# Altium PCB dental-unit-button v1_0.PcbDoc
Units mm, origin at the board's own origin, x right, y up, seen from the top; angles counter-clockwise.
Board outline 41 x 57.5 mm, 2 copper layers (Top Layer, Bottom Layer), stack 0.571 mm thick; 52 components, 57 nets, 286 pads, 157 vias.
Unrouted connection lines stored in the file: 1.
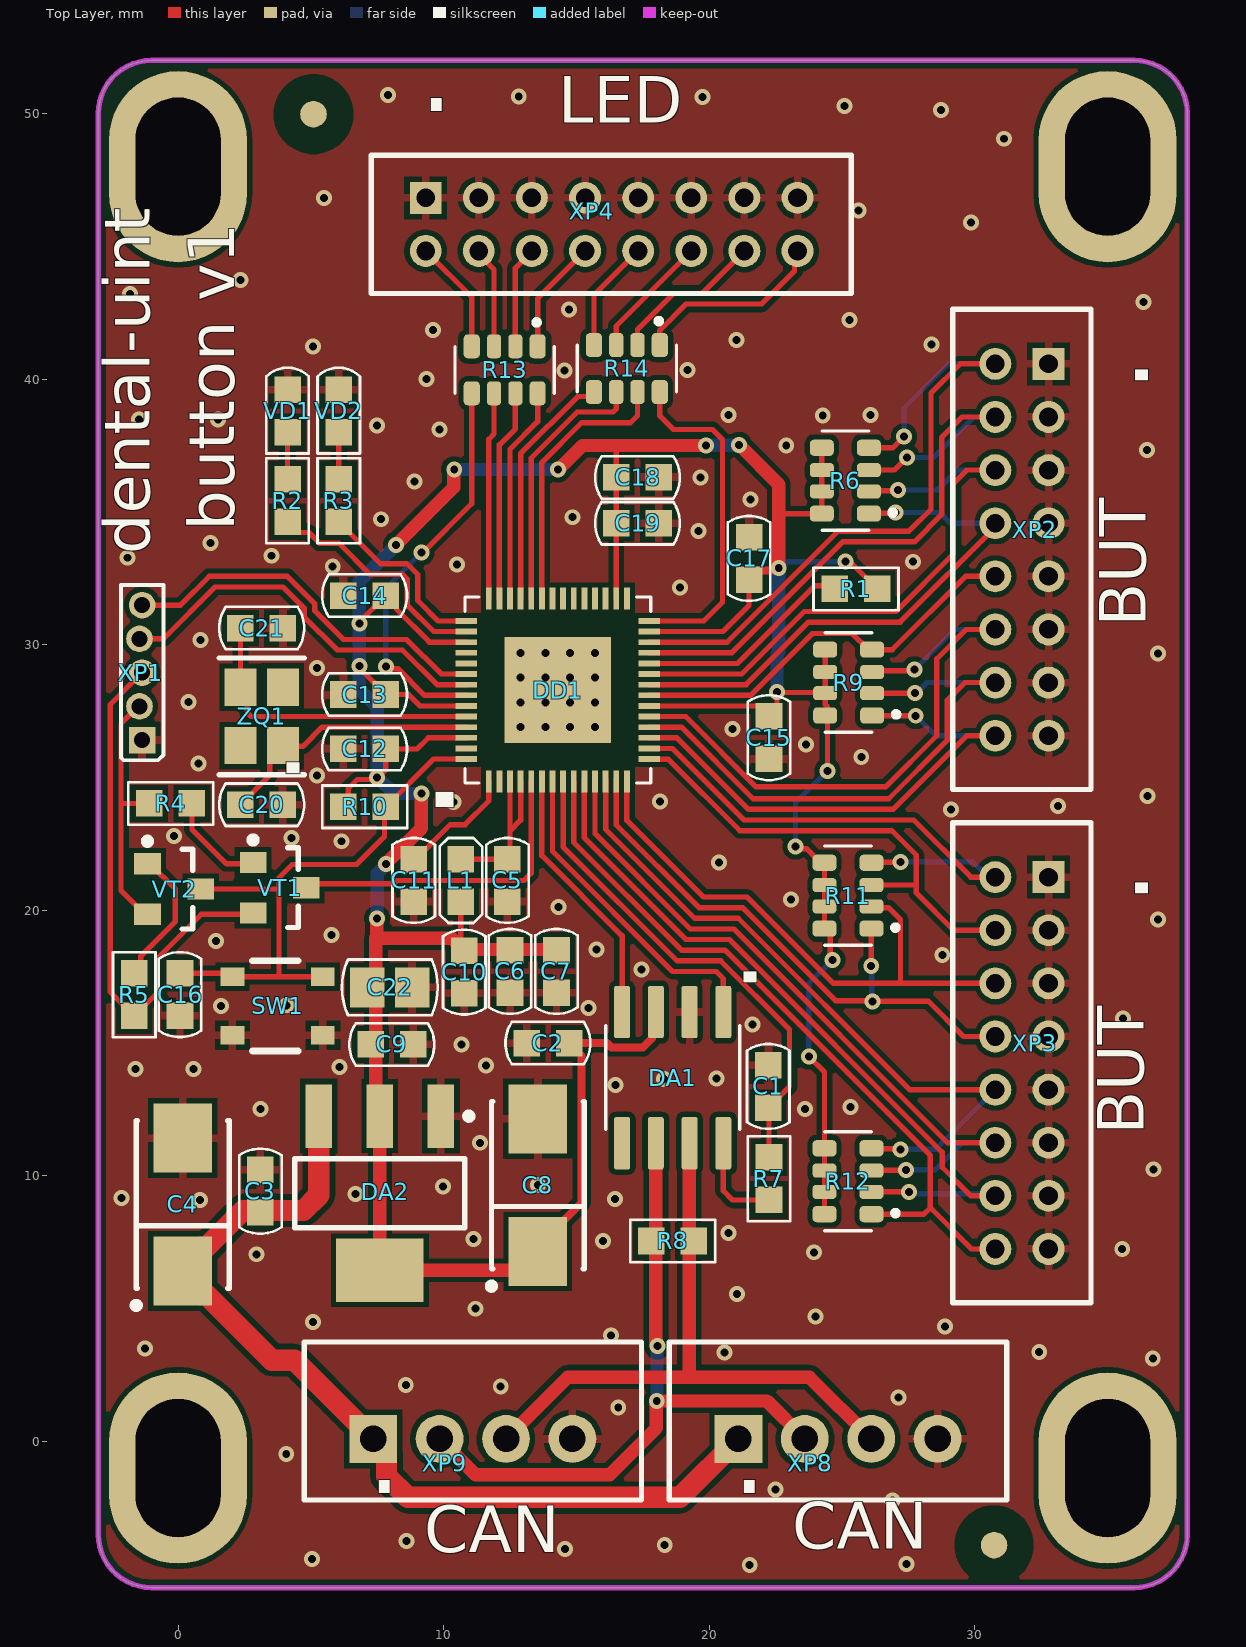
[diagram p0: Top Layer view]
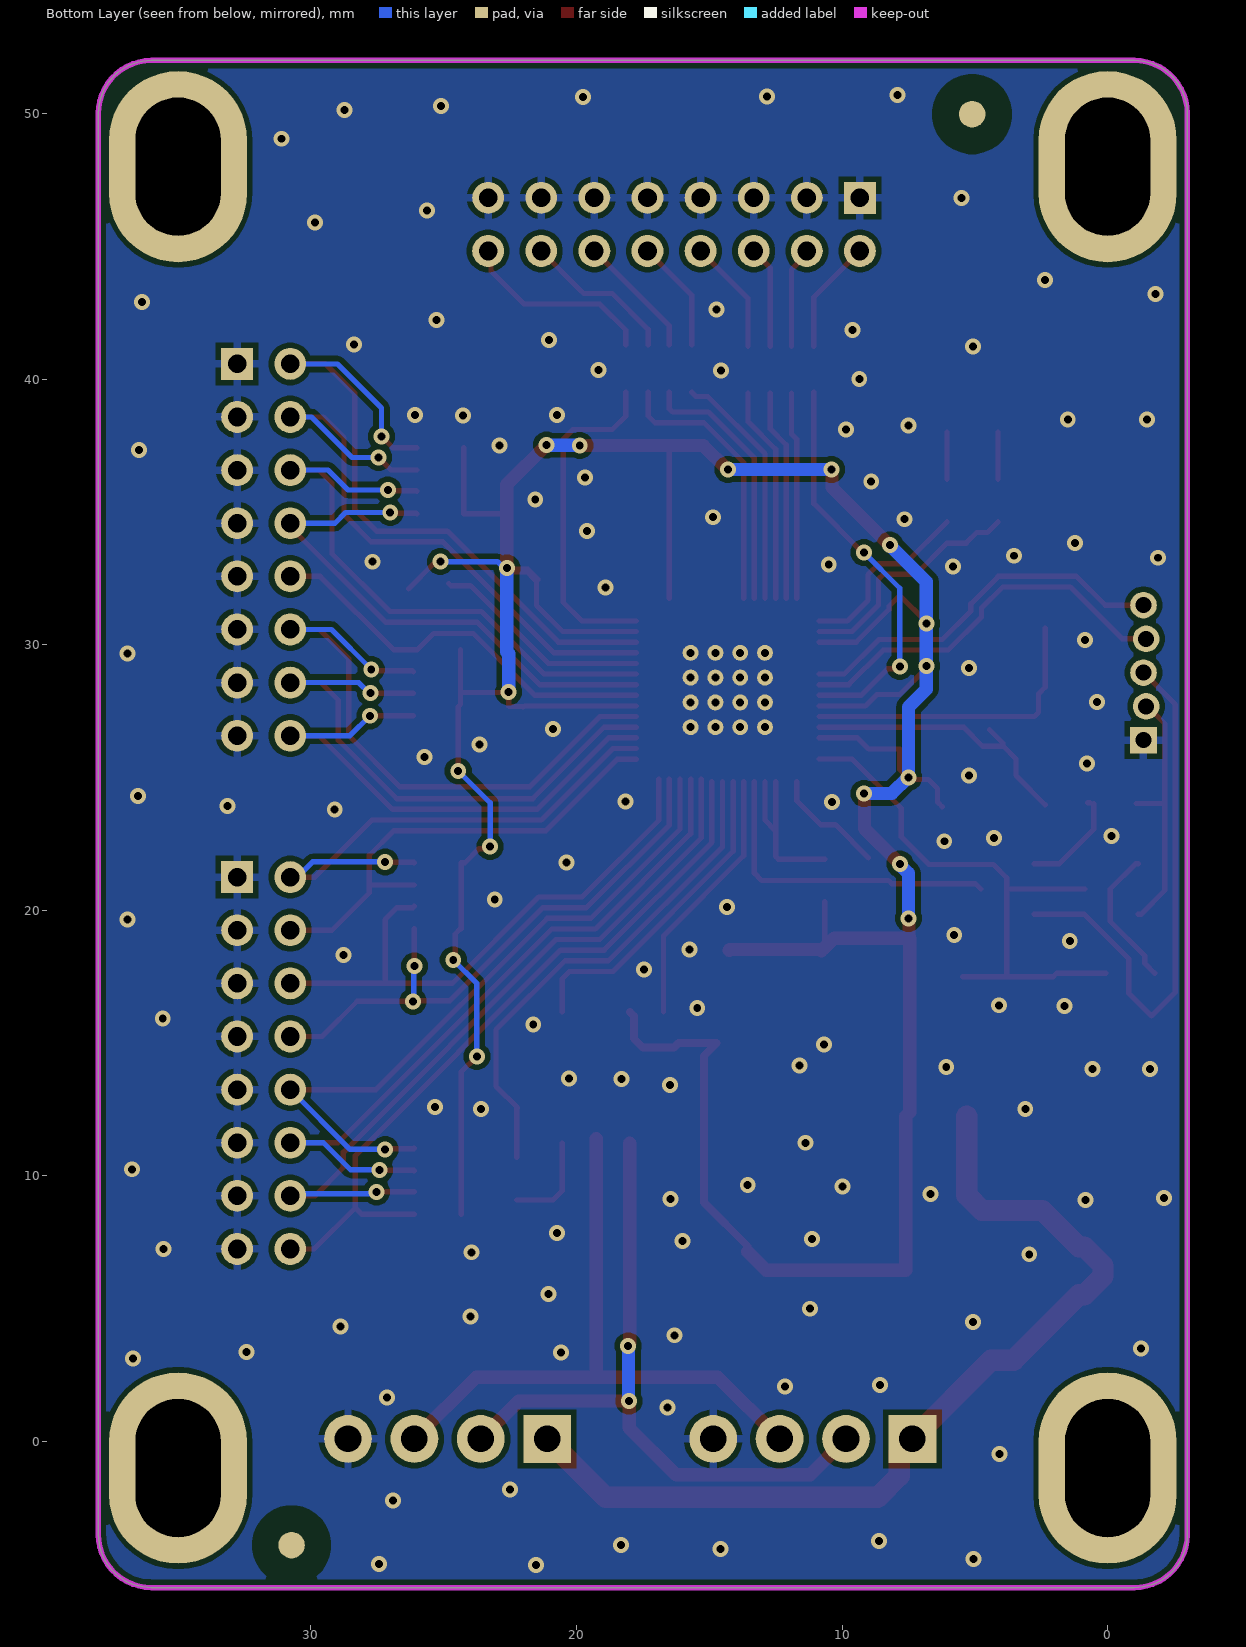
[diagram p1: Bottom Layer view, seen from below]
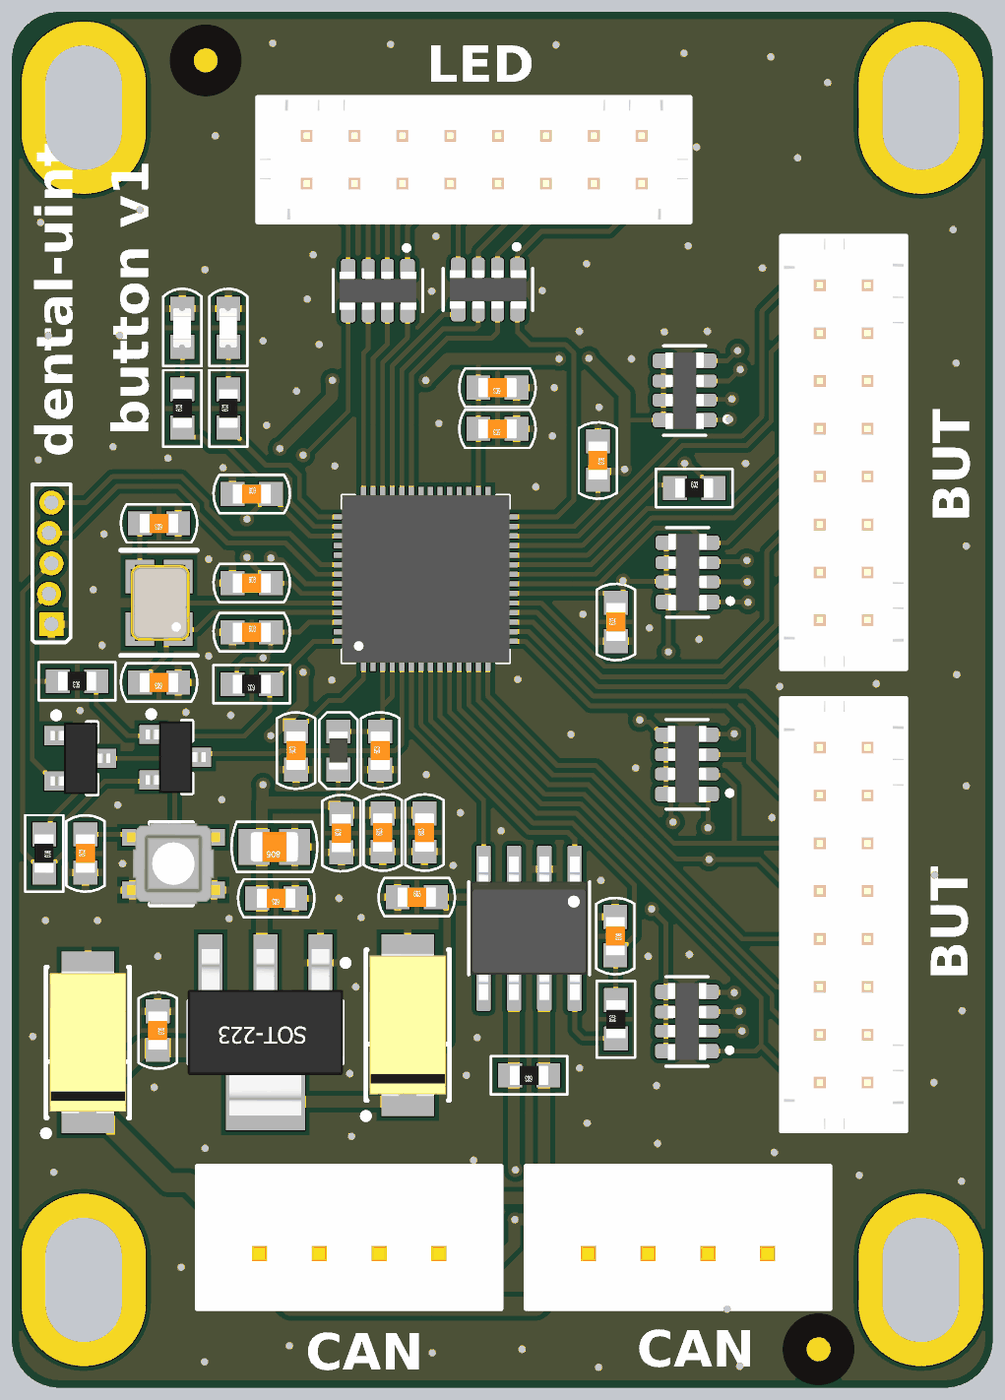
[diagram p2: 3D render of the assembled board from above, using the file's embedded part models]

## Layer stack, top to bottom
Top Solder: solder mask 0.0102, Solder Resist, Dk 3.5
Top Layer: signal copper 0.0356
Dielectric1: core 0.5, FR-4, Dk 4.8
Bottom Layer: signal copper 0.0356
Bottom Solder: solder mask 0.0102, Solder Resist, Dk 3.5

## Board outline
-3,-3.5 ccw(c-1,-3.5) -1,-5.5 36,-5.5 ccw(c36,-3.5) 38,-3.5 38,50 ccw(c36,50) 36,52 -1,52 ccw(c-1,50) -3,50

## Design rules (kind name [scope] priority, off if disabled: settings)
Clearance esp32 [InPadClass('ESP32-S2')] p1: gap=0.2 ignorepadtopadclearanceinfootprint=FALSE except(0: Arc-Hole Track-Hole SMDPad-Hole THPad-Hole Via-Hole Fill-Hole Poly-Hole Region-Hole Text-Hole; 0.15: Arc-SMDPad Track-SMDPad SMDPad-SMDPad)
Clearance "Stitching No Net" [IsStitchingVia and InNet('No Net') vs (IsVia and (Not IsStitchingVia)) Or IsPad] p2: gap=0.127 ignorepadtopadclearanceinfootprint=FALSE except(0: Arc-Hole Track-Hole SMDPad-Hole THPad-Hole Via-Hole Fill-Hole Poly-Hole Region-Hole Text-Hole)
Clearance Clearance_2 [(InPadClass('New Class 2')) vs (InPadClass('New Class 3'))] p3: gap=0.15 ignorepadtopadclearanceinfootprint=FALSE except(0: Arc-Hole Track-Hole SMDPad-Hole THPad-Hole Via-Hole Fill-Hole Poly-Hole Region-Hole Text-Hole)
Clearance Clearance_1 [InPadClass('Reper')] p4: gap=1 ignorepadtopadclearanceinfootprint=FALSE except(0: Arc-Hole Track-Hole SMDPad-Hole THPad-Hole Via-Hole Fill-Hole Poly-Hole Region-Hole Text-Hole)
Clearance [All] p5: gap=0.2 ignorepadtopadclearanceinfootprint=FALSE except(0: Arc-Hole Track-Hole SMDPad-Hole THPad-Hole Via-Hole Fill-Hole Poly-Hole Region-Hole Text-Hole)
HoleSize [All] p1: absolutevalues=TRUE maxlimit=7 minlimit=0.025 maxpercent=80.000 minpercent=20.000
HoleToHoleClearance [All] p1: gap=0.1 allowstackedmicrovias=TRUE
Length [InNetClass('SD_net_class')] p1: maxlimit=27 minlimit=26
MatchedLengths [InNetClass('SD_net_class')] p1: tolerance=1 checknetsindiffpair=FALSE checkdiffpairvsdiffpair=TRUE checkxsignals=TRUE checkothers=TRUE
MinimumSolderMaskSliver [All] p1 off: minsoldermaskwidth=0.1
PlaneClearance [All] p1: clearance=0.2
PlaneConnect [All] p1: planeconnectstyle=Direct reliefexpansion=0.2 reliefentries=4 reliefconductorwidth=0.2 reliefairgap=0.2
PolygonConnect Polygon_24v [InNamedPolygon('24V_L01_P000')] p1: connectstyle=Direct reliefconductorwidth=0.2 reliefentries=4 polygonreliefangle="90 Angle" airgapwidth=0.3
PolygonConnect PolygonConnectCoponent [(InPadClass('New Class'))] p2: connectstyle=Relief reliefconductorwidth=0.3 reliefentries=4 polygonreliefangle="90 Angle" airgapwidth=0.2
PolygonConnect PolygonConnectALL [All] p3: connectstyle=Direct reliefconductorwidth=0.3 reliefentries=2 polygonreliefangle="45 Angle" airgapwidth=0.7
RoutingVias [All] p1: holewidth=0.3 width=0.6 viastyle="Through Hole" minholewidth=0.3 minwidth=0.6 maxholewidth=0.3 maxwidth=0.6
SilkToSilkClearance [All] p1 off: silktosilkclearance=0.254
SilkToSolderMaskClearance [IsPad] p1 off: minsilkscreentomaskgap=0.254 clearancetoexposedcopper=TRUE
SolderMaskExpansion [All] p1: expansion=0.05 istentingtop=FALSE
ViasUnderSMD [All] p1: allowed=FALSE
Width [All] p1: maxlimit=1.5 minlimit=0.2 preferedwidth=0.2
23 further rules are at their usual default settings.

## Classes and differential pairs
pad class ESP32-S2: DD1-1 DD1-2 DD1-3 DD1-4 DD1-5 DD1-6 DD1-7 DD1-8 DD1-9 DD1-10 DD1-11 DD1-12 DD1-13 DD1-14 DD1-15 DD1-16 DD1-17 DD1-18 DD1-19 DD1-20 DD1-21 DD1-22 DD1-23 DD1-24 DD1-25 DD1-26 DD1-27 DD1-28 DD1-29 DD1-30 DD1-31 DD1-32 DD1-33 DD1-34 DD1-35 DD1-36 DD1-37 DD1-38 DD1-39 DD1-40 DD1-41 DD1-42 DD1-43 DD1-44 DD1-45 DD1-46 DD1-47 DD1-48 DD1-49 DD1-50 DD1-51 DD1-52 DD1-53 DD1-54 DD1-55 DD1-56 DD1-57
pad class "Mounting Holes": Free-M0
pad class "New Class": C1-1 C1-2 C2-1 C2-2 C3-1 C3-2 C4-1 C4-2 C5-1 C5-2 C6-1 C6-2 C7-1 C7-2 C8-1 C8-2 C9-1 C9-2 C10-1 C10-2 C11-1 C11-2 C12-1 C12-2 C13-1 C13-2 C14-1 C14-2 C15-1 C15-2 C16-1 C16-2 C17-1 C17-2 C18-1 C18-2 C19-1 C19-2 C20-1 C20-2 C21-1 C21-2 C22-1 C22-2 DA1-1 DA1-2 DA1-3 DA1-4 DA1-5 DA1-6 DA1-7 DA1-8 DA2- DA2-1 DA2-2 DA2-3 DA2-4 DD1-1 DD1-2 DD1-3 DD1-4 DD1-5 DD1-6 DD1-7 DD1-8 DD1-9 DD1-10 DD1-11 DD1-12 DD1-13 DD1-14 DD1-15 DD1-16 DD1-17 DD1-18 DD1-19 DD1-20 DD1-21 DD1-22 DD1-23 DD1-24 DD1-25 DD1-26 DD1-27 DD1-28 DD1-29 DD1-30 DD1-31 DD1-32 DD1-33 DD1-34 DD1-35 DD1-36 DD1-37 DD1-38 DD1-39 DD1-40 DD1-41 DD1-42 DD1-43 DD1-44 DD1-45 DD1-46 DD1-47 DD1-48 DD1-49 DD1-50 DD1-51 DD1-52 DD1-53 DD1-54 DD1-55 DD1-56 Free-M0 L1-1 L1-2 R1-1 R1-2 R2-1 R2-2 R3-1 R3-2 R4-1 R4-2 R5-1 R5-2 R6-1 R6-2 R6-3 R6-4 R6-5 R6-6 R6-7 R6-8 R7-1 R7-2 R8-1 R8-2 R9-1 R9-2 R9-3 R9-4 R9-5 R9-6 R9-7 R9-8 R10-1 R10-2 R11-1 R11-2 R11-3 R11-4 R11-5 R11-6 R11-7 R11-8 R12-1 R12-2 R12-3 R12-4 R12-5 R12-6 R12-7 R12-8 R13-1 R13-2 R13-3 R13-4 R13-5 R13-6 R13-7 R13-8 R14-1 R14-2 R14-3 R14-4 R14-5 R14-6 R14-7 R14-8 SW1-1 SW1-2 VD1-1 VD1-2 VD2-1 VD2-2 VT1-1 VT1-2 VT1-3 VT2-1 VT2-2 VT2-3 XP1-1 XP1-2 XP1-3 XP1-4 XP1-5 XP2- XP2-1 XP2-2 XP2-3 XP2-4 XP2-5 XP2-6 XP2-7 XP2-8 XP2-9 XP2-10 XP2-11 XP2-12 XP2-13 XP2-14 XP2-15 XP2-16 XP3- XP3-1 XP3-2 XP3-3 XP3-4 XP3-5 XP3-6 XP3-7 XP3-8 XP3-9 XP3-10 XP3-11 XP3-12 XP3-13 XP3-14 XP3-15 XP3-16 XP4- XP4-1 XP4-2 XP4-3 XP4-4 XP4-5 XP4-6 XP4-7 XP4-8 XP4-9 XP4-10 XP4-11 XP4-12 XP4-13 XP4-14 XP4-15 XP4-16 XP8- XP8-1 XP8-2 XP8-3 XP8-4 XP9- XP9-1 XP9-2 XP9-3 XP9-4 ZQ1-1 ZQ1-2 ZQ1-3 ZQ1-4
pad class Reper: Free-RepPoint2

## Components (designator, comment, footprint, x,y, rotation, side; value= is the part's Value field where it differs from the comment)
C1 "CC0603KRX7R5BB104" CC_0603 22.225,13.37 r270 top value=0.1uF
C2 "CC0603KRX7R5BB104" CC_0603 13.925,15 r0 top value=0.1uF
C3 "CC0603KRX7R5BB104" CC_0603 3.1,9.425 r270 top value=0.1uF
C4 "TS20001C470KCT000R" CC_TANT_C 0.175,8.925 r90 top value=47uF
C5 "CC0603KRX7R5BB104" CC_0603 12.4,21.125 r90 top value=0.1uF
C6 "CC0603KRX7R5BB104" CC_0603 12.5,17.7 r90 top value=0.1uF
C7 "CL10A105KB8NNNC" CC_0603 14.25,17.7 r90 top value=1uF
C8 "TS20001C470KCT000R" CC_TANT_C 13.55,9.65 r90 top value=47uF
C9 "CC0603KRX7R5BB104" CC_0603 8.05,14.95 r180 top value=0.1uF
C10 "CL10A106KP8NNNC" CC_0603 10.775,17.675 r90 top value=10uF
C11 "CC0603KRX7R5BB104" CC_0603 8.875,21.125 r90 top value=0.1uF
C12 "CC0603FRNPO9BN101" CC_0603 7.025,26.075 r0 top value=100pF
C13 "CL10A105KB8NNNC" CC_0603 7.025,28.125 r0 top value=1uF
C14 "CC0603KRX7R5BB104" CC_0603 7.025,31.85 r0 top value=0.1uF
C15 "CC0603KRX7R5BB104" CC_0603 22.25,26.5 r90 top value=0.1uF
C16 "CC0603KRX7R5BB104" CC_0603 0.075,16.825 r90 top value=0.1uF
C17 "CC0603KRX7R5BB104" CC_0603 21.5,33.25 r270 top value=0.1uF
C18 "CC0603KRX7R5BB104" CC_0603 17.3,36.3 r180 top value=0.1uF
C19 "CL10A105KB8NNNC" CC_0603 17.3,34.575 r180 top value=1uF
C20 "CC0603GPNPO9BN150" CC_0603 3.15,23.975 r180 top value=15pF
C21 "CC0603GPNPO9BN150" CC_0603 3.15,30.625 r180 top value=15pF
C22 "GRM21BR60J226ME39L" CC_0805 7.975,17.1 r180 top value=22uF
DA1 "SN65HVD230D" SOIC-8 18.625,13.7 r270 top
DA2 "LM1117IMPX-3.3" SOT-223 7.6,9.35 r270 top
DD1 "ESP32-S2FH4" QFN40P700X700X90-57T400N 14.3,28.295 r90 top value=ESP32-S2
L1 "LQG18HN1N8S00D" IC_0603 10.65,21.125 r270 top
R1 "AC0603FR-0710KL" RC_0603 25.525,32.1 r0 top value=10K
R2 "AC0603FR-071KL" RC_0603 4.125,35.425 r90 top value=1K
R3 "AC0603FR-071KL" RC_0603 6.05,35.425 r90 top value=1K
R4 "AC0603FR-0710KL" RC_0603 -0.275,24.025 r180 top value=10K
R5 "AC0603FR-0710KL" RC_0603 -1.65,16.825 r270 top value=10K
R6 "YC164-JR-0710KL" RC_0603x4 25.125,36.175 r180 top value=10K
R7 "AC0603FR-0710KL" RC_0603 22.25,9.895 r90 top value=10K
R8 "RC0603FR-07120RL" RC_0603 18.625,7.55 r180 top value=120
R9 "YC164-JR-0710KL" RC_0603x4 25.25,28.575 r180 top value=10K
R10 "AC0603FR-0710KL" RC_0603 7.025,23.9 r180 top value=10K
R11 "YC164-JR-0710KL" RC_0603x4 25.225,20.55 r180 top value=10K
R12 "YC164-JR-0710KL" RC_0603x4 25.225,9.8 r180 top value=10K
R13 "YC164-JR-0710KL" RC_0603x4 12.3,40.35 r270 top value=10K
R14 "YC164-JR-0710KL" RC_0603x4 16.9,40.4 r270 top value=10K
SW1 "SWT-1184" IT-1184 3.75,16.4 r270 top
VD1 "0603BUC" LED_0603 4.125,38.8 r90 top
VD2 "0603RHC" LED_0603 6.05,38.8 r90 top
VT1 "MMBT3904" SOT-23-3 3.825,20.85 r0 top
VT2 "MMBT3904" SOT-23-3 -0.15,20.8 r0 top
XP1 "1x5x1.27" XT_1x5x1.27_offset -1.35,28.95 r90 top
XP2 "B16B-PHDSS(LF)(SN)" B16B-PHDSS 31.775,33.575 r270 top
XP3 "B16B-PHDSS(LF)(SN)" B16B-PHDSS 31.775,14.25 r270 top
XP4 "B16B-PHDSS(LF)(SN)" B16B-PHDSS 16.325,45.825 r0 top
XP8 "KLS1-2.50-04-S" KLS1-2.50-04-S 24.85,0.1 r0 top
XP9 "KLS1-2.50-04-S" KLS1-2.50-04-S 11.1,0.1 r0 top
ZQ1 "X322540MPB4SI" "OSC: 3225" 3.15,27.3 r90 top value="40 MHz"

## Footprints (in the part's own frame and the unit in brackets; to place one, negate y for a bottom-side part, rotate by r counter-clockwise, add the part's x,y. Pads: shape width x height; smd on the part's side, far side on the other; paste and mask are expansions set on the pad)
B16B-PHDSS [mm]
  rect 1.2x1.2 hole 0.7: 1(-7,1)
  round 1.2 hole 0.7: 2(-7,-1) 3(-5,1) 4(-5,-1) 5(-3,1) 6(-3,-1) 7(-1,1) 8(-1,-1) 9(1,1) 10(1,-1) 11(3,1) 12(3,-1) 13(5,1) 14(5,-1) 15(7,1) 16(7,-1)
  round 0.5 on Mech1: ""(-8.5,1.975)
  silkscreen extent -9.05,-2.6 9.03,2.6, body extent -8.95,-2.5 8.95,2.5, height 6.5
CC_0603 [mm]
  rect 1x1 smd: 1(-0.8,0) 2(0.8,0)
  silkscreen extent -1.6,-0.8 1.6,0.8, body extent -0.8,-0.4 0.8,0.4, height 0.3
CC_0805 [mm]
  rect 1.3x1.5 smd: 1(-0.85,0) 2(0.85,0)
  silkscreen extent -1.8,-1.05 1.8,1.05, body extent -1,-0.63 1,0.62, height 0.78
CC_TANT_C [mm]
  rect 2.6x2.2 smd: 1(-2.5,0) 2(2.5,0)
  silkscreen extent -3.92,-1.75 3.15,1.87, body extent -2.99,-1.6 3,1.6, height 2.51
IC_0603 [mm]
  rect 1x1 smd: 1(-0.8,0) 2(0.8,0)
  silkscreen extent -1.6,-0.8 1.6,0.8, body extent -0.8,-0.4 0.8,0.4, height 0.8
IT-1184 [mm]
  rect 0.7x0.9 smd: 1(-1.1,1.7) 1(-1.1,-1.7) 2(1.1,1.7) 2(1.1,-1.7)
  silkscreen extent -1.7,-0.95 1.7,0.77, body extent -1.7,-1.95 1.7,1.95, height 1.5
KLS1-2.50-04-S [mm]
  rect 1.8x1.8 hole 1: 1(-3.75,0)
  round 1.8 hole 1: 2(-1.25,0) 3(1.25,0) 4(3.75,0)
  round 0.5 on Mech1: ""(-5.85,-1.825)
  silkscreen extent -6.35,-2.3 6.35,3.65, body extent -6.25,-2.2 6.25,3.55, height 7
LED_0603 [mm]
  rect 1x1 smd: 1(-0.8,0) 2(0.8,0)
  silkscreen extent -1.6,-0.8 1.63,0.8, body extent -0.82,-0.35 0.82,0.38, height 0.68
"OSC: 3225" [mm]
  rect 1.4x1.2 smd: 1(-1.1,-0.8) 2(1.1,-0.8) 3(1.1,0.8) 4(-1.1,0.8)
  silkscreen extent -2.2,-1.6 2.2,1.6, body extent -1.6,-1.3 1.6,1.2, height 0.61
QFN40P700X700X90-57T400N [mm]
  rect 0.81x0.22 smd: 1(-3.445,2.6) 2(-3.445,2.2) 3(-3.445,1.8) 4(-3.445,1.4) 5(-3.445,1) 6(-3.445,0.6) 7(-3.445,0.2) 8(-3.445,-0.2) 9(-3.445,-0.6) 10(-3.445,-1) 11(-3.445,-1.4) 12(-3.445,-1.8) 13(-3.445,-2.2) 14(-3.445,-2.6) 29(3.445,-2.6) 30(3.445,-2.2) 31(3.445,-1.8) 32(3.445,-1.4) 33(3.445,-1) 34(3.445,-0.6) 35(3.445,-0.2) 36(3.445,0.2) 37(3.445,0.6) 38(3.445,1) 39(3.445,1.4) 40(3.445,1.8) 41(3.445,2.2) 42(3.445,2.6)
  rect 0.22x0.81 smd: 15(-2.6,-3.445) 16(-2.2,-3.445) 17(-1.8,-3.445) 18(-1.4,-3.445) 19(-1,-3.445) 20(-0.6,-3.445) 21(-0.2,-3.445) 22(0.2,-3.445) 23(0.6,-3.445) 24(1,-3.445) 25(1.4,-3.445) 26(1.8,-3.445) 27(2.2,-3.445) 28(2.6,-3.445) 43(2.6,3.445) 44(2.2,3.445) 45(1.8,3.445) 46(1.4,3.445) 47(1,3.445) 48(0.6,3.445) 49(0.2,3.445) 50(-0.2,3.445) 51(-0.6,3.445) 52(-1,3.445) 53(-1.4,3.445) 54(-1.8,3.445) 55(-2.2,3.445) 56(-2.6,3.445)
  round 0.6 hole 0.3: 57(-1.4,-1.4) 57(-1.4,-0.467) 57(-1.4,0.467) 57(-1.4,1.4) 57(-0.467,1.4) 57(-0.467,-0.467) 57(-0.467,0.467) 57(-0.467,-1.4) 57(0.467,1.4) 57(0.467,-0.467) 57(0.467,0.467) 57(0.467,-1.4) 57(1.4,-1.4) 57(1.4,-0.467) 57(1.4,0.467) 57(1.4,1.4)
  rect 4x4 smd: 57(0,0)
  silkscreen extent -3.5,-3.5 3.5,3.5, body extent -3.5,-3.5 3.5,3.5, height 0.9
RC_0603 [mm]
  rect 1x1 smd: 1(-0.8,0) 2(0.8,0)
  silkscreen extent -1.6,-0.8 1.6,0.8, body extent -0.8,-0.4 0.8,0.4, height 0.3
RC_0603x4 [mm]
  rrect50% 0.9x0.61 smd: 1(-0.885,1.24) 4(-0.885,-1.24) 5(0.885,-1.24) 8(0.885,1.24)
  rrect50% 0.9x0.53 smd: 2(-0.885,0.4) 3(-0.885,-0.4) 6(0.885,-0.4) 7(0.885,0.4)
  silkscreen extent -1.89,-1.87 0.88,1.87, body extent -0.8,-1.6 0.8,1.6, height 0.7
SOIC-8 [mm]
  rrect25% 1.97x0.6 smd: 1(-2.47,1.905) 2(-2.47,0.635) 3(-2.47,-0.635) 4(-2.47,-1.905) 5(2.47,-1.905) 6(2.47,-0.635) 7(2.47,0.635) 8(2.47,1.905)
  silkscreen extent -1.95,-2.52 1.95,2.53, body extent -3,-2.45 3,2.45, height 1.75
SOT-23-3 [mm]
  rect 1x0.8 smd: 1(-1,0.95) 2(-1,-0.95) 3(1,0)
  silkscreen extent -1.12,-1.5 0.7,1.92, body extent -1.23,-1.5 1.27,1.5, height 1
SOT-223 [mm]
  rect 2.4x1 smd: 1(-2.9,2.3) 2(-2.9,0) 3(-2.9,-2.3)
  rect 2.4x3.3 smd: 4(2.9,0)
  round 0.5 on Mech1: ""(-3,2.7)
  silkscreen extent -3.02,-3.2 1.3,3.48, body extent -3.48,-3.25 3.48,3.25, height 1.65
XT_1x5x1.27_offset [mm]
  rect 1x1 hole 0.6: 1(-2.54,0)
  round 1 hole 0.6: 2(-1.27,0.1) 3(0,0) 4(1.27,0.1) 5(2.54,0)
  silkscreen extent -3.3,-0.8 3.3,0.8

## Part data
C1 C2 C3 C5 C6 C9 C11 C14 C15 C16 C17 C18: library part C, "Cap Ceramic, 0603, 0.1u, 10%, 16V, X7R (Yageo)", type=CC0603KRX7R5BB104
C4 C8: library part C_polar, "47uF, 16v, C, 10%, @SUNTAN,", type=TS20001C470KCT000R
C7 C13 C19: library part C, "Cap Ceramic, 0603, 1u, 10%, 50V, X5R (Sumsung)", type=CL10A105KB8NNNC
C10: library part C, "Cap Ceramic, 0603, 10u, 10%, 16V, X5R (Sumsung)", type=CL10A106KP8NNNC
C12: library part C, "Cap Ceramic, 0603, 100p, 1%, 50V, NP0 (Yageo)", type=CC0603FRNPO9BN101
C20 C21: library part C, "Cap Ceramic, 0603, 15pF, 50V, NP0 (Yageo)", type=CC0603GPNPO9BN150
C22: library part C, "Cap Ceramic, 0805, 22u, 20%, 6.3V, X5R, -55 +85C (Murata)", type=GRM21BR60J226ME39L
DA1: "3.3-V CAN TRANSCEIVERS, @TI", ComponentLink1Description=link, ComponentLink1URL=https://www.elitan.ru/pdf/0/1/8/5/1/01851789.pdf, type=SN65HVD230D
DA2: "LDO, 3.3v, 0.8A, SOT-223, Texas Instruments", type=LM1117S-3.3
DD1: library part ESP32-S2, "SMD WI-FI IC, ESP32-S2FH4, SINGAL-C", Package=None, Availability=Unavailable, ComponentLink1Description=link, ComponentLink1URL=https://www.espressif.com/sites/default/files/documentation/esp32-s2_datasheet_en.pdf, MF="Espressif Systems", MP=ESP32-S2, Price=None, SnapEDA_Link=https://www.snapeda.com/parts/ESP32-S2/Espressif%20Systems/view-part/4571535/?ref=snap
L1: library part L, "1.1A, 1.8nH,100mΩ, 0603, Inductors (SMD), @MURATA", type=0603
R1 R4 R5 R7 R10: library part R, "Res, 0603, 10K, 1%, 0.25W (ф. Yageo)", power=0.25W, type=AC0603FR-0710KL
R2 R3: library part R, "Res, 0603, 1K 1%, 0.25W (ф. Yageo)", power=0.25W, type=AC0603FR-071KL
R6 R9 R11 R12 R13 R14: library part R_Array, "Res, 0603x4, 10K, 5%, 0.25W (ф. Yageo)", power=0.25W, type=YC164-JR-0710KL
R8: library part R, "Res, 0603, 120, 1%, 0.25W (ф. Yageo)", power=0.25W, type=RC0603FR-07120RL
SW1: library part smd-side-push-button
VD1: library part LED, "Led, 0603, BLUE, 20mA, 125, 140MCD, CPMELEC"
VD2: library part LED, "Led, 0603, RED, 20mA, 125, 140MCD, CPMELEC"
VT1 VT2: library part N-P-N-SOT-23, type=MMBT3904
XP1: library part XT_1x5x1_27, type=1x5x1.27
XP8 XP9: library part KLS1-2.50-04-x, "2.5mm, 4pin, KLS", ComponentLink1Description=link, ComponentLink1URL=https://www.triatron.ru/upload/catalog_photo/elements/pdf/212764.pdf, name=can
ZQ1: library part "OSC 3225", "40MHz, 15pF, ±10ppm, SMD3225-4P, Crystals ROHS, @YXC", type=X322540MPB4SI
XP2 XP3 XP4: type=B16B-PHDSS(LF)(SN)

## Free pads (board coordinates)
  oval 5.2x7.2 hole 3.2 slot 5.2 at 90 deg unplated: M0(0,-1) M0(0,48) M0(35,-1) M0(35,48)
  round 1 all layers, no hole paste+1 mask+1: RepPoint2(5.1,49.975) RepPoint2(30.725,-3.9)

## Via types
v1: diameter 0.6, hole 0.3, Top Layer to Bottom Layer, tented both sides, 157 vias

## Nets (pads, with @x,y where several pads share a name; then routed paths per layer and width w, separated by ;. In a path a pad name is that pad's centre, name@x,y a point inside that pad or via, vN(x,y) a via of type N, cw(c..) or ccw(c..) an arc to the next point about the centre after c; other vN are vias at no path point)
3.3V: C2.2 C6.2 C7.2 C8.1 C9.2 C10.2 C11.2 C12.2 C13.2 C14.2 C15.2 C17.2 C18.2 C19.2 C22.2 DA1.3 DA2.2 DA2.4 DD1.1 DD1.20 DD1.27 DD1.30 DD1.45 DD1.51 DD1.54 L1.2 R1.2 R6.5 R6.6 R6.7 R6.8 R9.5 R9.6 R9.7 R9.8 R10.2 R11.5 R11.6 R11.7 R11.8 R12.5 R12.6 R12.7 R12.8 | length 154.7
  Top Layer w0.2: R10.2 6.408,24.083 6.408,24.583 6.748,24.923 7.423,24.923 v1(7.5,25) 7.523,25 7.825,25.302 C12.2 9,26.075 9.42,26.495 DD1.54 ; v1(6.825,29.2) 6.825,29.125 C13.2 8.684,28.125 9.113,27.695 DD1.51 ; v1(6.825,30.8) 6.825,30.85 C14.2 8.225,31.45 8.225,31.334 9.464,30.095 DD1.45 ; C11.2@9,21.975 10.25,23.225 10.813,23.225 11.7,24.112 DD1.1 ; C10.2@10.65,18.6 L1.2 ; 16.375,37.5 16.5,37.375 C18.2 C19.2 DD1.30 ; DD1.20 C15.2@21.95,27.695 ; DD1.27 20.514,30.495 21.5,31.481 C17.2 ; C15.2@22,27.67 22.005,27.675 22.525,27.675 22.55,27.7 v1(22.55,28.225) 22.575,28.2 24.34,28.2 R9.7 ; 22.618,35.05 22.733,34.935 R6.8 R6.7 R6.6 R6.5 ; v1(23.25,22.4) 23.327,22.323 23.662,22.323 24.195,21.79 R11.5 R11.6 R11.7 R11.8 24.359,19.31 24.56,19.109 24.56,18.213 v1(24.637,18.137) ; v1(23.749,14.499) 24.34,13.908 R12.5 R12.6 R12.7 R12.8 ; R9.5 R9.6 R9.7 ; v1(24.45,25.25) 24.45,27.67 24.365,27.755 R9.7 ; v1@25.376,33.049 R1.2
  Top Layer w0.3: C8.1 13.55,7.35 15.2,9 15.2,14.525 C2.2 16.154,15 16.319,14.835 17.499,14.835 17.84,15.176 17.84,16.02 DA1.3 ; C17.2 21.85,32.8 22.455,32.8 22.537,32.882 v1(22.618,32.882)
  Top Layer w0.5: v1(7.5,19.7) 7.481,19.681 7.481,18.979 7.45,18.948 ; v1(7.825,21.75) 9.156,23.081 9.156,24.381 v1(9.175,24.4) ; v1(8.2,33.75) 10.381,35.931 10.381,36.581 v1(10.4,36.6) ; C10.2 C10.2@10.725,18.525 ; C8.1 12.85,6.45 DA2.4 DA2.2 7.45,12.4 7.45,14.95 7.45,17.1 7.45,18.948 ; C7.2 14.225,18.525 12.5,18.525 C10.2@10.725,18.525 ; v1(14.3,36.6) 14.327,36.6 15.227,37.5 16.375,37.5 v1(19.875,37.5) ; v1(21.125,37.525) 22.618,36.032 22.618,35.05 v1(22.618,32.882) ; 7.45,18.948 10.302,18.948 10.65,18.6 C10.2@10.725,18.525
  Bottom Layer w0.2: v1(22.618,32.882) 22.726,32.882 22.97,33.126 v1(25.124,33.126) ; v1(23.25,22.4) 23.25,24.05 v1(24.45,25.25) ; v1(23.749,14.499) 23.749,17.249 v1(24.637,18.137)
  Bottom Layer w0.5: v1(7.5,19.7) 7.5,21.398 7.825,21.723 v1(7.825,21.75) ; v1(8.2,33.75) 6.825,32.375 v1(6.825,30.8) v1(6.825,29.2) 6.825,28.325 7.5,27.65 v1(7.5,25) 7.527,25 8.125,24.402 9.173,24.402 v1(9.175,24.4) ; v1(10.4,36.6) v1(14.3,36.6) ; v1(19.875,37.5) 19.887,37.513 21.113,37.513 v1(21.125,37.525) ; v1(22.55,28.225) 22.55,29.656 22.618,29.724 v1(22.618,32.882)
5V: C3.2 C4.1 DA2.3 XP8.1 XP9.1 | length 35.4
  Top Layer w0.8: DA2.3 5.3,9.275 4.725,8.7 2.45,8.7 1.075,7.325 0.875,7.325 0.175,6.625 C4.1 0.175,6.225 0.875,5.525 1.075,5.525 3.537,3.062 4.388,3.062 XP9.1 ; XP9.1@7.338,0.1 7.349,0.1 7.849,-0.4 7.849,-1.299 8.65,-2.1 18.9,-2.1 XP8.1
BOOT: DD1.5 VT1.3 | length 12.2
  Top Layer w0.2: VT1.3@4.775,20.8 4.975,21 8.126,21 8.251,21.125 9.499,21.125 ; 9.499,21.125 11.776,21.125 ; 11.776,21.125 13.024,21.125 13.3,21.401 DD1.5
CAN_RS: C1.2 DD1.8 R7.2 | length 19
  Top Layer w0.2: DD1.8 14.5,22.389 18.789,18.1 20.431,18.1 23.025,15.506 23.025,13.37 C1.2 22.25,12.545 R7.2
CAN_RX: DA1.4 DD1.6 | length 9.9
  Top Layer w0.2: DD1.6 13.7,22.058 16.72,19.038 DA1.4
CAN_TX: DA1.1 DD1.7 | length 12.3
  Top Layer w0.2: DD1.7 14.1,22.223 18.623,17.7 20.265,17.7 20.53,17.435 DA1.1
DTR: R5.2 VT1.2 XP1.3 | length 20.6
  Top Layer w0.2: XP1.3 -2.55,27.75 -2.55,16.925 R5.2 -0.8,16.875 -0.8,18.174 0.876,19.85 VT1.2@2.775,19.85
EN: C16.2 DD1.56 R10.1 SW1.1 VT2.3 | length 21.6
  Top Layer w0.2: C16.2 1.925,17.625 2.05,17.5 3.8,17.5 ; VT2.3 3.8,20.8 ; SW1.1@5.45,17.5 3.8,17.5 ; DD1.56 9.62,25.695 R10.1 7.775,23.85 7.775,22.775 6.725,21.725 4.3,21.725 3.8,21.225 3.8,20.8 ; 3.8,17.5 3.8,20.8
GND: C1.1 C2.1 C3.1 C4.2 C5.1 C6.1 C7.1 C8.2 C9.1 C10.1 C11.1 C12.1 C13.1 C14.1 C15.1 C16.1 C17.1 C18.1 C19.1 C20.1 C21.1 C22.1 DA1.2 DA2.1 DD1.57 SW1.2 VD1.2 VD2.2 XP1.1 XP2.1 XP2.3 XP2.5 XP2.7 XP2.9 XP2.11 XP2.13 XP2.15 XP3.1 XP3.3 XP3.5 XP3.7 XP3.9 XP3.11 XP3.13 XP3.15 XP4.1 XP4.3 XP4.5 XP4.7 XP4.9 XP4.11 XP4.13 XP4.15 XP8.4 XP9.4
  other v1: 21.525,-4.65 27.429,-4.612 5.05,-4.425 14.575,-4.05 18.325,-3.9 8.6,-3.75 26.9,-2.225 22.5,-1.8 4.075,-0.475 16.575,1.275 27.125,1.65 12.15,2.075 8.575,2.125 36.7,3.125 20.575,3.35 32.425,3.375 -1.25,3.5 16.3,4 28.875,4.325 5.075,4.5 23.994,4.701 11.2,5 21.05,5.55 2.95,7.05 23.95,7.125 35.55,7.25 16,7.55 11.125,7.625 20.731,7.855 0.825,9.1 16.452,9.13 -2.125,9.175 6.675,9.325 9.975,9.6 13.55,9.65 36.725,10.25 11.374,11.248 3.1,12.525 23.6,12.525 25.325,12.6 16.475,13.425 18.3,13.65 20.275,13.675 -1.6,14.025 0.575,14.025 6.075,14.1 11.6,14.15 10.675,14.95 21.625,15.7 35.575,15.925 15.45,16.325 1.625,16.4 4.09,16.425 17.45,17.775 28.775,18.325 15.75,18.525 1.425,18.85 5.775,19.075 36.9,19.65 14.325,20.125 23.075,20.4 20.375,21.8 6.15,22.6 4.275,22.725 -0.15,22.8 29.1,23.8 33.136,23.92 10.375,24.075 18.15,24.1 36.5,24.3 5.225,25.075 0.775,25.525 25.725,25.775 23.65,26.25 20.875,26.825 0.4,27.85 5.225,29.125 36.9,29.675 0.85,30.175 18.9,32.15 5.825,32.95 10.5,33.025 27.675,33.125 -1.9,33.275 3.525,33.35 1.225,33.825 19.6,34.275 7.65,34.725 14.85,34.8 21.55,35.475 8.9,36.15 19.675,36.3 36.475,37.325 22.9,37.5 9.85,38.1 7.5,38.25 -1.475,38.475 1.5,38.475 24.275,38.625 20.725,38.65 26.075,38.65 9.35,40 14.55,40.325 19.175,40.35 5.075,41.225 28.375,41.3 21.025,41.475 9.6,41.85 25.275,42.225 14.725,42.625 36.35,42.9 -1.8,43.2 2.35,43.725 29.85,45.9 25.625,46.35 5.5,46.825 31.1,49.05 28.725,50.125 25.1,50.275 19.75,50.625 12.828,50.645 7.905,50.694
IN_1: DD1.26 R6.4 XP2.2 | length 26.8
  Top Layer w0.2: DD1.26 20.679,30.095 24.859,34.275 27.525,34.275 28.35,35.1 28.35,39.475 29.45,40.575 XP2.2@30.85,40.575 ; R6.4 26.913,37.415 v1(27.341,37.842)
  Bottom Layer w0.2: v1(27.341,37.842) 27.341,38.916 28.994,40.569 30.844,40.569 XP2.2@30.85,40.575
IN_2: DD1.25 R6.3 XP2.4 | length 24.2
  Top Layer w0.2: DD1.25 20.845,29.695 25.025,33.875 27.725,33.875 28.75,34.9 28.75,37.8 29.525,38.575 XP2.4@30.85,38.575 ; R6.3 26.975,36.575 v1(27.45,37.05)
  Bottom Layer w0.2: v1(27.45,37.05) 28.45,37.05 29.975,38.575 XP2.4@30.85,38.575
IN_3: DD1.23 R6.2 XP2.6 | length 23
  Top Layer w0.2: DD1.23 21.224,28.895 23.579,31.25 27.025,31.25 29.2,33.425 29.2,36.075 29.7,36.575 XP2.6@30.85,36.575 ; R6.2 26.035,35.8 27.075,35.8 v1(27.1,35.825)
  Bottom Layer w0.2: v1(27.1,35.825) 28.6,35.825 29.35,36.575 XP2.6@30.85,36.575
IN_4: DD1.22 R6.1 XP2.8 | length 20.7
  Top Layer w0.2: DD1.22 21.389,28.495 23.744,30.85 27.191,30.85 30.85,34.509 XP2.8@30.85,34.575 ; R6.1 26.03,34.955 26.99,34.955 v1(27.01,34.975)
  Bottom Layer w0.2: v1(27.01,34.975) 28.687,34.975 29.087,34.575 XP2.8@30.85,34.575
IN_5: DD1.21 R9.4 XP2.10 | length 15.5
  Top Layer w0.2: DD1.21 21.555,28.095 23.884,30.424 25.381,30.424 25.99,29.815 R9.4 26.89,29.815 29.65,32.575 XP2.10@30.85,32.575
IN_6: DD1.19 R9.3 XP2.12 | length 23.7
  Top Layer w0.2: DD1.19 19.118,27.295 21.763,24.65 26.644,24.65 28.567,26.574 28.567,29.467 29.675,30.575 XP2.12@30.85,30.575 ; R9.3 26.185,29.025 27.675,29.025 v1(27.725,29.075)
  Bottom Layer w0.2: v1(27.725,29.075) 29.225,30.575 XP2.12@30.85,30.575
IN_7: DD1.18 R9.2 XP2.14 | length 21.8
  Top Layer w0.2: DD1.18 18.952,26.895 21.647,24.2 26.759,24.2 28.967,26.408 28.967,27.917 29.625,28.575 XP2.14@30.85,28.575 ; R9.2 v1(27.75,28.175)
  Bottom Layer w0.2: v1(27.75,28.175) 27.799,28.175 28.199,28.575 XP2.14@30.85,28.575
IN_8: DD1.17 R9.1 XP2.16 | length 20.4
  Top Layer w0.2: DD1.17 18.786,26.495 21.481,23.8 26.925,23.8 29.7,26.575 XP2.16@30.85,26.575 ; R9.1 26.14,27.33 27.77,27.33 v1(27.775,27.325)
  Bottom Layer w0.2: v1(27.775,27.325) 28.525,26.575 XP2.16@30.85,26.575
IN_9: DD1.16 R11.4 XP3.2 | length 20
  Top Layer w0.2: DD1.16 18.621,26.095 21.316,23.4 27.7,23.4 29.85,21.25 XP3.2 ; R11.4 26.127,21.808 27.182,21.808 v1(27.2,21.825)
  Bottom Layer w0.2: v1(27.2,21.825) 29.929,21.825 30.504,21.25 XP3.2
IN_10: DD1.15 R11.3 XP3.4 | length 18.2
  Top Layer w0.2: DD1.15 17.755,25.685 18.465,25.685 21.15,23 26.874,23 27.8,22.074 27.8,20.9 ; R11.3 27.75,20.95 27.8,20.9 ; XP3.4 29.2,19.25 27.8,20.65 27.8,20.9
IN_11: DD1.14 R11.2 XP3.6 | length 21.7
  Top Layer w0.2: DD1.14@16.9,24.93 DD1.14 16.9,23.388 19.788,20.5 21.425,20.5 24.675,17.25 27.2,17.25 ; R11.2 26.16,20.1 26.75,20.1 27.2,19.65 27.2,17.25 ; XP3.6 27.2,17.25
IN_12: DD1.13 R11.1 XP3.8 | length 22
  Top Layer w0.2: DD1.13@16.5,24.93 DD1.13 16.5,23.217 19.617,20.1 21.259,20.1 24.759,16.6 v1@26.125,16.6 ; v1(26.1,17.9) 26.105,17.905 26.105,19.305 R11.1 ; v1(26.15,16.575) 28.25,16.575 29.575,15.25 XP3.8
  Bottom Layer w0.2: v1(26.1,17.9) 26.125,17.875 26.125,16.6 v1(26.15,16.575)
IN_13: DD1.12 R12.4 XP3.10 | length 26.2
  Top Layer w0.2: DD1.12@16.1,24.93 DD1.12 16.1,23.052 19.452,19.7 21.094,19.7 27.544,13.25 XP3.10 ; R12.4 26.13,11.02 27.18,11.02 v1(27.2,11)
  Bottom Layer w0.2: v1(27.2,11) 28.525,11 XP3.10
IN_14: DD1.11 R12.3 XP3.12 | length 27
  Top Layer w0.2: DD1.11@15.7,24.93 DD1.11 15.7,22.886 19.286,19.3 20.928,19.3 28.978,11.25 XP3.12 ; R12.3 26.124,10.214 27.393,10.214 v1(27.406,10.227)
  Bottom Layer w0.2: v1(27.406,10.227) 28.498,10.227 29.521,11.25 XP3.12
IN_15: DD1.10 R12.2 XP3.14 | length 28.3
  Top Layer w0.2: DD1.10@15.3,24.93 DD1.10 15.3,22.72 19.12,18.9 20.762,18.9 28.775,10.887 28.775,10.325 29.85,9.25 XP3.14 ; R12.2 v1(27.525,9.4)
  Bottom Layer w0.2: v1(27.525,9.4) 27.6,9.325 30.7,9.325 XP3.14
IN_16: DD1.9 R12.1 XP3.16 | length 28
  Top Layer w0.2: DD1.9 14.9,22.555 18.955,18.5 20.597,18.5 28.325,10.772 28.325,8.8 ; R12.1 28.085,8.56 28.325,8.8 ; XP3.16 29.875,7.25 28.325,8.8
LED_1: DD1.50 R13.5 | length 15.2
  Top Layer w0.2: v1(7.825,29.175) 7.902,29.098 8.276,29.098 9.279,28.095 DD1.50 ; v1(9.175,33.475) 9.225,33.475 11.06,35.31 R13.5 R13.5@11.06,39.508
  Bottom Layer w0.2: v1@7.825,29.125 v1(7.825,29.175) 7.825,32.125 v1(9.175,33.475)
LED_2: DD1.42 R13.6 | length 7.8
  Top Layer w0.2: DD1.42 11.7,37.731 11.9,37.931 R13.6
LED_3: DD1.41 R13.7 | length 8
  Top Layer w0.2: DD1.41 12.1,37.525 12.7,38.125 R13.7
LED_4: DD1.40 R13.8 | length 8.2
  Top Layer w0.2: DD1.40 12.5,37.359 13.54,38.399 R13.8
LED_5: DD1.39 R14.5 | length 9.2
  Top Layer w0.2: DD1.39 12.9,37.194 15.055,39.349 15.494,39.349 R14.5
LED_6: DD1.38 R14.6 | length 9.9
  Top Layer w0.2: DD1.38 13.3,37.028 15.031,38.759 16.383,38.759 16.5,38.876 R14.6
LED_7: DD1.37 R14.7 | length 10.3
  Top Layer w0.2: DD1.37 13.7,36.862 15.197,38.359 17.039,38.359 17.3,38.62 R14.7
LED_8: DD1.28 R14.8 | length 12.8
  Top Layer w0.2: DD1.28 19.795,30.895 20.5,31.6 20.5,37.724 20.124,38.1 18.65,38.1 18.14,38.61 R14.8
LED_BLUE: DD1.44 R2.1 | length 9
  Top Layer w0.2: R2.1 4.525,34.225 4.926,34.225 5.326,33.825 6.05,33.825 7.225,32.65 8.449,32.65 8.625,32.474 8.625,31.5 9.63,30.495 DD1.44
LED_RED: DD1.43 R3.1 | length 6.9
  Top Layer w0.2: R3.1 7.625,33.05 8.615,33.05 9.025,32.64 9.025,31.666 9.796,30.895 DD1.43
NetC5_2: C5.2 DD1.3 DD1.4 L1.1 | length 6.7
  Top Layer w0.2: L1.1 C5.2 12.5,22.025 12.5,22.994 ; DD1.3 12.5,22.994 ; DD1.4 12.9,23.394 12.5,22.994
NetC20_2: C20.2 DD1.53 ZQ1.1 | length 10.9
  Top Layer w0.2: C20.2 3.45,25.075 3.45,25.7 ZQ1.1 ; ZQ1.1@4.45,26.8 3.95,26.3 ZQ1.1 ; DD1.53 5.42,26.895 4.7,26.175 3.975,26.175 ZQ1.1
NetC21_2: C21.2 DD1.52 ZQ1.3 | length 11.6
  Top Layer w0.2: C21.2 ZQ1.3 2.6,28.15 2.6,27.45 2.755,27.295 DD1.52
NetDA1_6: DA1.6 R8.2 XP8.2 XP9.2 | length 26.4
  Top Layer w0.5: XP9.2 11.2,-1.25 16.25,-1.25 18.006,0.506 18.006,1.506 v1(18.025,1.525) 22.175,1.525 XP8.2 ; DA1.6 17.99,8.375 17.99,7.55 17.99,3.687 18.05,3.627 v1(18.05,3.6)
  Bottom Layer w0.5: v1(18.025,1.525) 18.038,1.538 18.038,3.588 v1(18.05,3.6)
NetDA1_7: DA1.7 R8.1 XP8.3 XP9.3 | length 24.7
  Top Layer w0.5: XP9.3 14.675,2.425 19.25,2.425 ; DA1.7@19.25,11.401 19.25,7.55 19.25,2.425 ; XP8.3 23.775,2.425 19.25,2.425
NetDA1_8: DA1.8 R7.1 | length 3.6
  Top Layer w0.2: DA1.8 20.53,9.445 20.88,9.095 R7.1
NetDD1_24: DD1.24 R1.1 | length 8.3
  Top Layer w0.2: DD1.24 21.058,29.295 23.988,32.225 24.725,32.225 R1.1@24.808,32.308
NetR2_2: R2.2 VD1.1 | length 1.8
  Top Layer w0.2: R2.2 VD1.1
NetR3_2: R3.2 VD2.1 | length 1.8
  Top Layer w0.2: R3.2 VD2.1
NetR4_1: R4.1 VT1.1 | length 3.8
  Top Layer w0.2: R4.1 0.525,23.05 1.825,21.75 VT1.1@2.775,21.75 ; R4.1@0.675,24.05 R4.1@0.75,24.05
NetR5_1: R5.1 VT2.1 | length 5.3
  Top Layer w0.2: R5.1@-1.775,17.625 -1.401,17.999 -1.401,18.275 -0.1,19.576 -0.1,20.8 -1.05,21.75 VT2.1
NetR13_1: R13.1 XP4.8 | length 4.3
  Top Layer w0.2: R13.1 13.54,43.04 XP4.8
NetR13_2: R13.2 XP4.6 | length 3.8
  Top Layer w0.2: R13.2 12.7,44.177 13.325,44.802 XP4.6
NetR13_3: R13.3 XP4.4 | length 3.8
  Top Layer w0.2: XP4.4 11.325,44.702 11.9,44.127 R13.3
NetR13_4: R13.4 XP4.2 | length 4.3
  Top Layer w0.2: XP4.2 11.06,43.09 R13.4
NetR14_1: R14.1 XP4.16 | length 7.4
  Top Layer w0.2: R14.1 18.14,41.84 19.125,42.825 21.975,42.825 23.214,44.064 23.214,44.714 XP4.16
NetR14_2: R14.2 XP4.14 | length 5.8
  Top Layer w0.2: R14.2 17.3,41.875 18.65,43.225 19.725,43.225 19.9,43.4 XP4.14
NetR14_3: R14.3 XP4.12 | length 4.7
  Top Layer w0.2: R14.3 16.5,42 XP4.12
NetR14_4: R14.4 XP4.10 | length 4.2
  Top Layer w0.2: R14.4 15.66,43.16 XP4.10
RTS: R4.2 VT2.2 XP1.2 | length 9.7
  Top Layer w0.2: XP1.2 -1.504,27.68 -2.15,27.034 -2.15,24.025 ; VT2.2 -1.25,19.85 -2.15,20.75 -2.15,24.025 ; R4.2 -2.15,24.025
RX: DD1.49 XP1.4 | length 14.8
  Top Layer w0.2: XP1.4 -0.555,30.22 1.4,32.175 3.95,32.175 4.75,31.375 4.75,31.05 6,29.8 8.444,29.8 9.749,28.495 DD1.49
TX: DD1.48 XP1.5 | length 14.3
  Top Layer w0.2: XP1.5 0.09,31.49 1.175,32.575 4.116,32.575 5.15,31.541 5.15,31.275 6.225,30.2 8.609,30.2 9.914,28.895 DD1.48
pads on no net: DA1.5 DA2. DD1.2 DD1.29 DD1.31 DD1.32 DD1.33 DD1.34 DD1.35 DD1.36 DD1.46 DD1.47 DD1.55 XP2. XP3. XP4. XP8. XP9. ZQ1.2 ZQ1.4

## Polygon pours and split planes (outlines as drawn)
GND on Bottom Layer "GND_L02_P001" (solid, pour order 1): -1,52 ccw(c-1,50) -3,50 -3,-3.5 ccw(c-1,-3.5) -1,-5.5 36,-5.5 ccw(c36,-3.5) 38,-3.5 38,50 ccw(c36,50) 36,52
GND on Top Layer "GND_L01_P000" (solid, pour order 0): -1,52 ccw(c-1,50) -3,50 -3,-3.5 ccw(c-1,-3.5) -1,-5.5 36,-5.5 ccw(c36,-3.5) 38,-3.5 38,50 ccw(c36,50) 36,52

## Keep-outs
Keep-Out Layer:
  the board outline again, w0.2

## Other copper
Top Layer:
  pour cut-out: 11.39,31.205 11.46,25.455 17.14,25.455 17.14,31.135

## Silkscreen, mask and mechanical layers (free items; w line width, h text height)
Top Overlay:
  text "LED" at 14.325,49.075 h3
  text "button v1" at 2.7,34.3 h3 r90
  text "dental-uint" at -0.475,33.4 h3 r90
  text "BUT" at 37.025,30.675 h3 r90
  text "BUT" at 36.95,11.55 h3 r90
  text "CAN" at 23.125,-4.625 h3
  text "CAN" at 9.275,-4.75 h3
Mechanical 3:
  the board outline again, w0.2